# EAGLE board rakboard2_pre_ar2_f1 (EAGLE 7.7.0), part 1 of 3
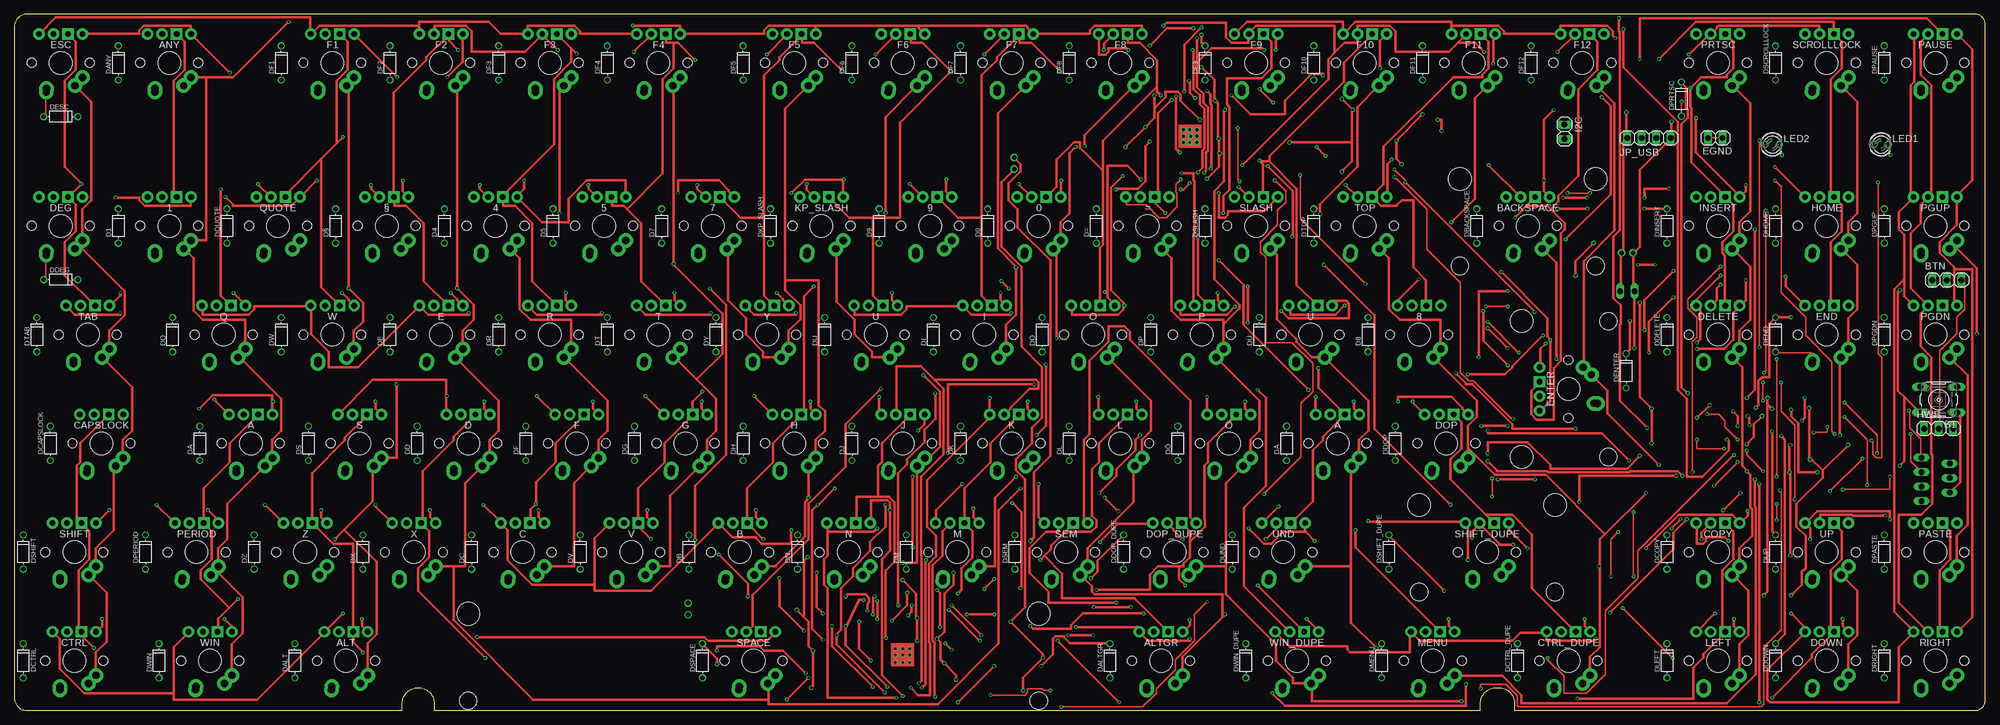
[diagram p0: board, top side]
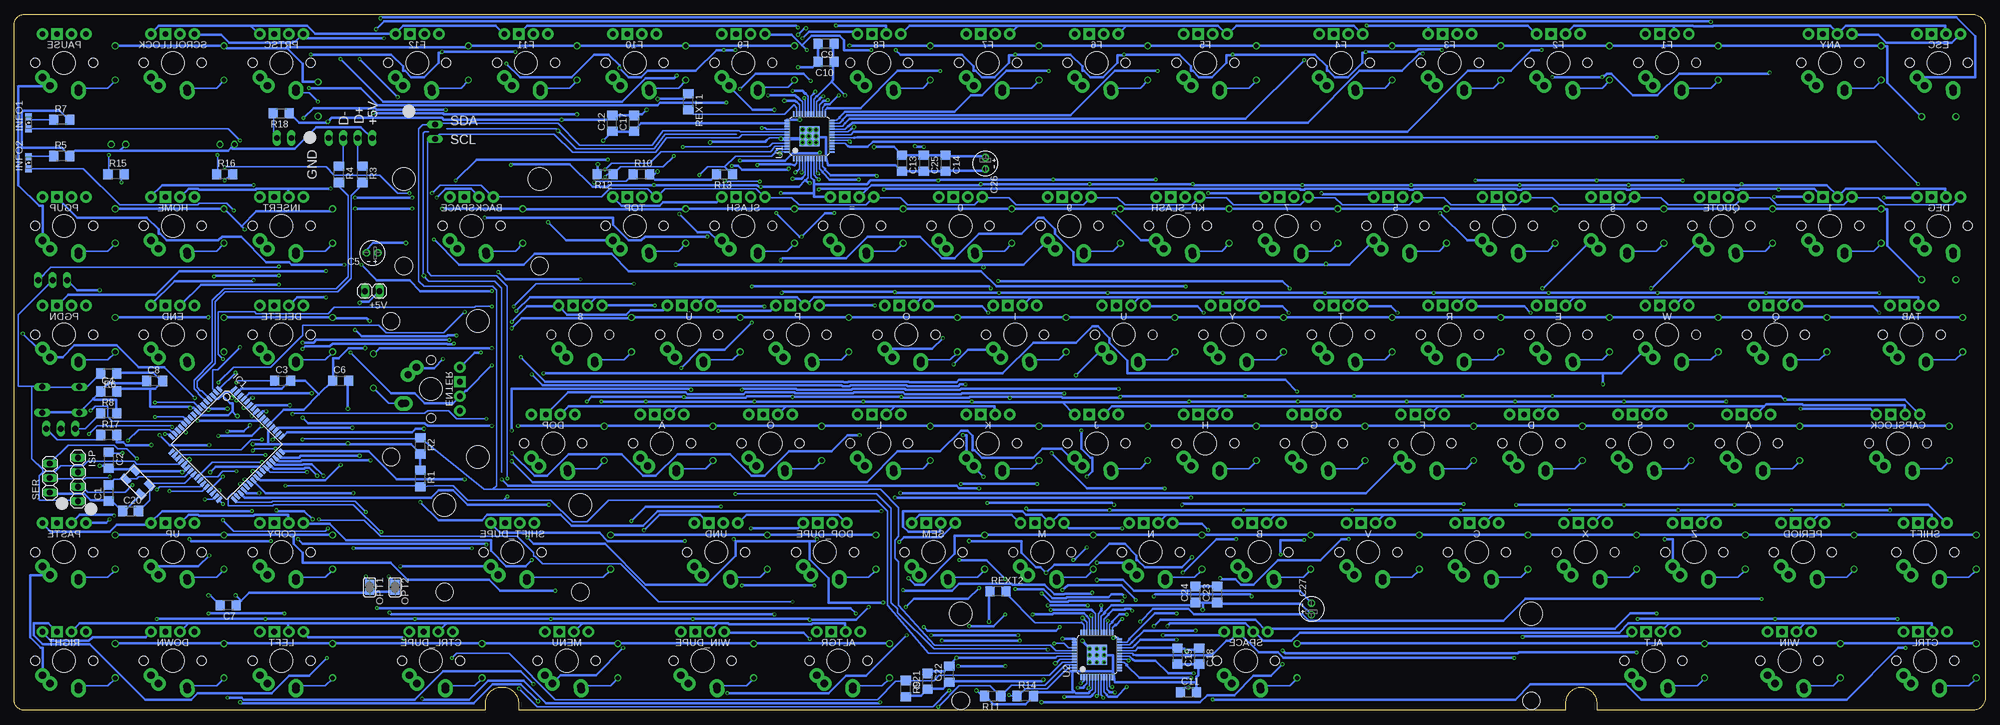
[diagram p1: board, bottom side, seen from below]

Size 345.5 x 122 mm. Coordinates in mm from the lower left corner, seen from the top.
Outline: 0,119.76 0,2.24 arc90 2.24,0 68,0 68,1.17 arc-90 70.83,4 arc-90 73.6,1.23 73.6,0 257,0 257,1.17 arc-90 259.83,4 260.17,4 arc-90 263,1.17 263,0 343.7,0 arc90 345.5,1.8 345.5,120.2 arc90 343.7,122 2.24,122 arc90 0,119.76
Copper layers (1*16): Top 0.035mm / dielectric 1.6mm / Bottom 0.035mm
Design rules "EasyEDAstd": minimum track width 6mil, minimum drill 0.3mm, track to track 6mil, track to pad 6mil, pad to pad 6mil, via to via 6mil, smd to smd 6mil, copper to edge 0.3mm, drill to drill 0.2mm, minimum pad ring 0.2mm, minimum via ring 0.15mm, stop-mask expansion 0.075mm, vias tented up to drill 0mil, thermal gap 0.2mm
Net classes: 0 default: width 0.305 mm, drill 0.254 mm, clearance 0.203 mm; 1 power: width 0.457 mm, drill 0.406 mm, clearance 0.203 mm; 2 gnd: width 0.457 mm, drill 0.406 mm, clearance 0.203 mm; 3 leddriver: width 0.406 mm, drill 0.305 mm, clearance 0.203 mm; 4 keyboard: width 0.406 mm, drill 0.356 mm, clearance 0.203 mm; 5 i2c: width 0.305 mm, drill 0.254 mm, clearance 0.203 mm

## Footprints (pad centres in the part's own frame; a part is rotated, then mirrored left to right if it is on the bottom)
ALPSMX-1U-RGB = drill 1.3 pad 2.54: ALPS1 -2.5,4; ALPS2 2.5,4.5; MX1 -3.81,2.54; MX2 2.54,5.08 | drill 1 pad 2: B- 3.81,-5.08; G- 1.27,-5.08; R- -3.81,-5.08 | drill 1 pad 2 square: LED+ -1.27,-5.08 | hole 4: 0,0 | hole 1.6: -5.08,0; 5.08,0
1X02 = drill 1.016 long: 1 -1.27,0; 2 1.27,0
ALPSMX-2U-RGB = drill 1.3 pad 2.54: ALPS1 -2.5,4; ALPS2 2.5,4.5; MX1 -3.81,2.54; MX2 2.54,5.08 | drill 1 pad 2: B- 3.81,-5.08; G- 1.27,-5.08; R- -3.81,-5.08 | drill 1 pad 2 square: LED+ -1.27,-5.08 | hole 4: 0,0; -11.9,-8.24; 11.9,-8.24 | hole 1.6: -5.08,0; 5.08,0 | hole 3.05: -11.9,7; 11.9,7
1X03 = drill 1.016 long: 1 -2.54,0; 2 0,0; 3 2.54,0
C1206 = smd 1.6 x 1.8: 1 -1.4,0; 2 1.4,0
E2-4 = drill 0.813 pad 1.27: + -1.016,0 | drill 0.813 pad 1.27 octagon: - 1.016,0
DO-35 = drill 0.8: A -3,0; C 3,0
TQFP64 = smd 1.194 x 0.559: 1 -7.76,5.905; 2 -7.76,5.118; 3 -7.76,4.331; 4 -7.76,3.543; 5 -7.76,2.756; 6 -7.76,1.968; 7 -7.76,1.181; 8 -7.76,0.394; 9 -7.76,-0.394; 10 -7.76,-1.181; 11 -7.76,-1.968; 12 -7.76,-2.756; 13 -7.76,-3.543; 14 -7.76,-4.331; 15 -7.76,-5.118; 16 -7.76,-5.905; 33 7.76,-5.905; 34 7.76,-5.118; 35 7.76,-4.331; 36 7.76,-3.543; 37 7.76,-2.756; 38 7.76,-1.968; 39 7.76,-1.181; 40 7.76,-0.394; 41 7.76,0.394; 42 7.76,1.181; 43 7.76,1.968; 44 7.76,2.756; 45 7.76,3.543; 46 7.76,4.331; 47 7.76,5.118; 48 7.76,5.905 | smd 0.559 x 1.194: 17 -5.905,-7.76; 18 -5.118,-7.76; 19 -4.331,-7.76; 20 -3.543,-7.76; 21 -2.756,-7.76; 22 -1.968,-7.76; 23 -1.181,-7.76; 24 -0.394,-7.76; 25 0.394,-7.76; 26 1.181,-7.76; 27 1.968,-7.76; 28 2.756,-7.76; 29 3.543,-7.76; 30 4.331,-7.76; 31 5.118,-7.76; 32 5.905,-7.76; 49 5.905,7.76; 50 5.118,7.76; 51 4.331,7.76; 52 3.543,7.76; 53 2.756,7.76; 54 1.968,7.76; 55 1.181,7.76; 56 0.394,7.76; 57 -0.394,7.76; 58 -1.181,7.76; 59 -1.968,7.76; 60 -2.756,7.76; 61 -3.543,7.76; 62 -4.331,7.76; 63 -5.118,7.76; 64 -5.905,7.76
SML0805 = smd 1.2 x 1.2: A 1.05,0; C -1.05,0
1X04 = drill 1.016 long: 1 -3.81,0; 2 -1.27,0; 3 1.27,0; 4 3.81,0
LED3MM = drill 0.813 octagon: A -1.27,0; K 1.27,0
SJ = smd 1.168 x 1.6: 1 -0.762,0; 2 0.762,0
MJ = smd 1.8 x 1.2: P1 -1.85,-1.15; P2 1.85,-1.15; P3 1.85,1.15; P4 -1.85,1.15
R1206 = smd 1.6 x 1.803: 1 -1.422,0; 2 1.422,0
B3F-10XX = drill 1.016 long: 1 -3.251,2.261; 2 3.251,2.261; 3 -3.251,-2.261; 4 3.251,-2.261
ALPSMX-6.25U-RGB = drill 1.3 pad 2.54: ALPS1 -2.5,4; ALPS2 2.5,4.5; MX1 -3.81,2.54; MX2 2.54,5.08 | drill 1 pad 2: B- 3.81,-5.08; G- 1.27,-5.08; R- -3.81,-5.08 | drill 1 pad 2 square: LED+ -1.27,-5.08 | hole 4: 0,0; -50,-8.24; 50,-8.24 | hole 1.6: -5.08,0; 5.08,0 | hole 3.05: -50,7; 50,7
LQFP48_7X7 = smd 0.9 x 0.3: 1 -3.95,2.75; 2 -3.95,2.25; 3 -3.95,1.75; 4 -3.95,1.25; 5 -3.95,0.75; 6 -3.95,0.25; 7 -3.95,-0.25; 8 -3.95,-0.75; 9 -3.95,-1.25; 10 -3.95,-1.75; 11 -3.95,-2.25; 12 -3.95,-2.75; 25 3.95,-2.75; 26 3.95,-2.25; 27 3.95,-1.75; 28 3.95,-1.25; 29 3.95,-0.75; 30 3.95,-0.25; 31 3.95,0.25; 32 3.95,0.75; 33 3.95,1.25; 34 3.95,1.75; 35 3.95,2.25; 36 3.95,2.75 | smd 0.3 x 0.9: 13 -2.75,-3.95; 14 -2.25,-3.95; 15 -1.75,-3.95; 16 -1.25,-3.95; 17 -0.75,-3.95; 18 -0.25,-3.95; 19 0.25,-3.95; 20 0.75,-3.95; 21 1.25,-3.95; 22 1.75,-3.95; 23 2.25,-3.95; 24 2.75,-3.95; 37 2.75,3.95; 38 2.25,3.95; 39 1.75,3.95; 40 1.25,3.95; 41 0.75,3.95; 42 0.25,3.95; 43 -0.25,3.95; 44 -0.75,3.95; 45 -1.25,3.95; 46 -1.75,3.95; 47 -2.25,3.95; 48 -2.75,3.95 | smd 3.5 x 3.5: TP 0,0

## Placement (x,y rotation side)
0  KEYSWITCH-RGBLED-ALPSMX-1U-RGB  [ALPSMX-1U-RGB]  179.59,84.9 180 top
1  KEYSWITCH-RGBLED-ALPSMX-1U-RGB  [ALPSMX-1U-RGB]  27.2,84.9 180 top
4  KEYSWITCH-RGBLED-ALPSMX-1U-RGB  [ALPSMX-1U-RGB]  84.34,84.9 180 top
5  KEYSWITCH-RGBLED-ALPSMX-1U-RGB  [ALPSMX-1U-RGB]  103.39,84.9 180 top
7  KEYSWITCH-RGBLED-ALPSMX-1U-RGB  [ALPSMX-1U-RGB]  122.44,84.9 180 top
8  KEYSWITCH-RGBLED-ALPSMX-1U-RGB  [ALPSMX-1U-RGB]  246.26,65.85 180 top
9  KEYSWITCH-RGBLED-ALPSMX-1U-RGB  [ALPSMX-1U-RGB]  160.54,84.9 180 top
+5V  PWR  [1X02]  282.75,73.47 180 bottom
=  KEYSWITCH-RGBLED-ALPSMX-1U-RGB  [ALPSMX-1U-RGB]  198.65,84.9 180 top
A  KEYSWITCH-RGBLED-ALPSMX-1U-RGB  [ALPSMX-1U-RGB]  41.48,46.8 180 top
ALT  KEYSWITCH-RGBLED-ALPSMX-1U-RGB  [ALPSMX-1U-RGB]  58.15,8.7 180 top
ALTGR  KEYSWITCH-RGBLED-ALPSMX-1U-RGB  [ALPSMX-1U-RGB]  201.03,8.7 180 top
ANY  KEYSWITCH-RGBLED-ALPSMX-1U-RGB  [ALPSMX-1U-RGB]  27.2,113.47 180 top
B  KEYSWITCH-RGBLED-ALPSMX-1U-RGB  [ALPSMX-1U-RGB]  127.2,27.75 180 top
BACKSPACE  KEYSWITCH-RGBLED-ALPSMX-2U-RGB  [ALPSMX-2U-RGB]  265.31,84.9 180 top
BTN  JP1  [1X03]  338.77,75.41 0 top
C  KEYSWITCH-RGBLED-ALPSMX-1U-RGB  [ALPSMX-1U-RGB]  89.11,27.75 180 top
C1  22pF  [C1206]  328.93,38.1 90 bottom
C2  1uF  [C1206]  328.93,43.81 270 bottom
C3  100n  [C1206]  298.45,57.78 0 bottom
C4  100n  [C1206]  328.93,55.88 0 bottom
C5  10uF  [E2-4]  282.75,80.19 180 bottom
C6  100n  [C1206]  288.29,57.78 0 bottom
C7  100n  [C1206]  307.98,18.41 180 bottom
C8  100n  [C1206]  320.9,57.74 0 bottom
C9  0,47uF  [C1206]  203.2,116.84 180 bottom
C10  0,1uF  [C1206]  203.2,113.67 180 bottom
C11  470nF  [C1206]  139.7,3.17 0 bottom
C12  0,47uF  [C1206]  240.66,102.87 90 bottom
C13  0,1uF  [C1206]  189.87,95.89 270 bottom
C14  470nF  [C1206]  182.25,95.89 270 bottom
C17  100nF  [C1206]  236.85,102.87 90 bottom
C18  0,47uF  [C1206]  137.79,9.53 270 bottom
C19  0,1uF  [C1206]  141.6,9.53 270 bottom
C20  22pF  [C1206]  325.12,34.92 0 bottom
C21  0,47uF  [C1206]  185.42,5.08 90 bottom
C22  0,1uF  [C1206]  181.61,6.35 90 bottom
C23  0,47uF  [C1206]  134.62,20.32 90 bottom
C24  0,1uF  [C1206]  138.43,20.32 90 bottom
C25  0,47uF  [C1206]  186.06,95.89 270 bottom
C26  22uF  [E2-4]  175.26,95.89 270 bottom
C27  22uF  [E2-4]  118.11,17.78 90 bottom
CAPSLOCK  KEYSWITCH-RGBLED-ALPSMX-1U-RGB  [ALPSMX-1U-RGB]  15.29,46.8 180 top
COPY  KEYSWITCH-RGBLED-ALPSMX-1U-RGB  [ALPSMX-1U-RGB]  298.65,27.75 180 top
CTRL  KEYSWITCH-RGBLED-ALPSMX-1U-RGB  [ALPSMX-1U-RGB]  10.53,8.7 180 top
CTRL_DUPE  KEYSWITCH-RGBLED-ALPSMX-1U-RGB  [ALPSMX-1U-RGB]  272.45,8.7 180 top
D  KEYSWITCH-RGBLED-ALPSMX-1U-RGB  [ALPSMX-1U-RGB]  79.58,46.8 180 top
D0  [DO-35]  170.65,84.9 90 top
D1  [DO-35]  18.25,84.9 90 top
D4  [DO-35]  75.39,84.9 90 top
D5  [DO-35]  94.44,84.9 90 top
D7  [DO-35]  113.5,84.9 90 top
D8  [DO-35]  237.31,65.85 90 top
D9  [DO-35]  151.59,84.9 90 top
D=  [DO-35]  189.69,84.9 90 top
DA  [DO-35]  32.52,46.8 90 top
DALT  [DO-35]  49.2,8.7 90 top
DALTGR  [DO-35]  192.07,8.7 90 top
DANY  [DO-35]  18.25,113.47 90 top
DB  [DO-35]  118.25,27.75 90 top
DBACKSPACE  [DO-35]  256.37,84.9 90 top
DC  [DO-35]  80.16,27.75 90 top
DCAPSLOCK  [DO-35]  6.33,46.8 90 top
DCOPY  [DO-35]  289.7,27.75 90 top
DCTRL  [DO-35]  1.57,8.7 90 top
DCTRL_DUPE  [DO-35]  263.5,8.7 90 top
DD  [DO-35]  70.62,46.8 90 top
DDEG  [DO-35]  8.14,75.48 0 top
DDELETE  [DO-35]  289.7,65.85 90 top
DDOP  [DO-35]  242.07,46.8 90 top
DDOP_DUPE  [DO-35]  194.46,27.75 90 top
DDOWN  [DO-35]  308.75,8.7 90 top
DE  [DO-35]  65.86,65.85 90 top
DEG  KEYSWITCH-RGBLED-ALPSMX-1U-RGB  [ALPSMX-1U-RGB]  8.14,84.9 180 top
DELETE  KEYSWITCH-RGBLED-ALPSMX-1U-RGB  [ALPSMX-1U-RGB]  298.65,65.85 180 top
DEND  [DO-35]  308.75,65.85 90 top
DENTER  [DO-35]  282.56,59.5 90 top
DESC  [DO-35]  8.14,104.06 0 top
DF  [DO-35]  89.67,46.8 90 top
DF1  [DO-35]  46.81,113.47 90 top
DF2  [DO-35]  65.86,113.47 90 top
DF3  [DO-35]  84.92,113.47 90 top
DF4  [DO-35]  103.97,113.47 90 top
DF5  [DO-35]  127.78,113.47 90 top
DF6  [DO-35]  146.82,113.47 90 top
DF7  [DO-35]  165.88,113.47 90 top
DF8  [DO-35]  184.93,113.47 90 top
DF9  [DO-35]  208.75,113.47 90 top
DF10  [DO-35]  227.79,113.47 90 top
DF11  [DO-35]  246.84,113.47 90 top
DF12  [DO-35]  265.89,113.47 90 top
DG  [DO-35]  108.72,46.8 90 top
DH  [DO-35]  127.78,46.8 90 top
DHOME  [DO-35]  308.75,84.9 90 top
DI  [DO-35]  161.12,65.85 90 top
DINSERT  [DO-35]  289.7,84.9 90 top
DJ  [DO-35]  146.82,46.8 90 top
DK  [DO-35]  165.88,46.8 90 top
DKP_SLASH  [DO-35]  132.54,84.9 90 top
DL  [DO-35]  184.93,46.8 90 top
DLEFT  [DO-35]  289.7,8.7 90 top
DM  [DO-35]  156.35,27.75 90 top
DMENU  [DO-35]  239.69,8.7 90 top
DN  [DO-35]  137.31,27.75 90 top
DO  [DO-35]  180.16,65.85 90 top
DOP  KEYSWITCH-RGBLED-ALPSMX-1U-RGB  [ALPSMX-1U-RGB]  251.03,46.8 180 top
DOP_DUPE  KEYSWITCH-RGBLED-ALPSMX-1U-RGB  [ALPSMX-1U-RGB]  203.41,27.75 180 top
DOWN  KEYSWITCH-RGBLED-ALPSMX-1U-RGB  [ALPSMX-1U-RGB]  317.7,8.7 180 top
DP  [DO-35]  199.22,65.85 90 top
DPASTE  [DO-35]  327.81,27.75 90 top
DPAUSE  [DO-35]  327.81,113.47 90 top
DPERIOD  [DO-35]  23,27.75 90 top
DPGDN  [DO-35]  327.81,65.85 90 top
DPGUP  [DO-35]  327.81,84.9 90 top
DPRTSC  [DO-35]  292.25,107.12 90 top
DQ  [DO-35]  27.77,65.85 90 top
DQUOTE  [DO-35]  37.3,84.9 90 top
DR  [DO-35]  84.92,65.85 90 top
DRIGHT  [DO-35]  327.81,8.7 90 top
DS  [DO-35]  51.58,46.8 90 top
DSCROLLLOCK  [DO-35]  308.75,113.47 90 top
DSEM  [DO-35]  175.41,27.75 90 top
DSHIFT  [DO-35]  1.57,27.75 90 top
DSHIFT_DUPE  [DO-35]  240.97,27.75 90 top
DSLASH  [DO-35]  208.75,84.9 90 top
DSPACE  [DO-35]  120.64,8.7 90 top
DT  [DO-35]  103.97,65.85 90 top
DTAB  [DO-35]  3.96,65.85 90 top
DTOP  [DO-35]  227.79,84.9 90 top
DU  [DO-35]  142.06,65.85 90 top
DUND  [DO-35]  213.5,27.75 90 top
DUP  [DO-35]  308.75,27.75 90 top
DV  [DO-35]  99.2,27.75 90 top
DW  [DO-35]  46.81,65.85 90 top
DWIN  [DO-35]  25.39,8.7 90 top
DWIN_DUPE  [DO-35]  215.88,8.7 90 top
DX  [DO-35]  61.1,27.75 90 top
DY  [DO-35]  123.02,65.85 90 top
DZ  [DO-35]  42.05,27.75 90 top
D§  [DO-35]  56.34,84.9 90 top
DÄ  [DO-35]  223.03,46.8 90 top
DÖ  [DO-35]  203.97,46.8 90 top
DÜ  [DO-35]  218.26,65.85 90 top
E  KEYSWITCH-RGBLED-ALPSMX-1U-RGB  [ALPSMX-1U-RGB]  74.81,65.85 180 top
EGND  ESD  [1X02]  298.2,100.33 0 top
END  KEYSWITCH-RGBLED-ALPSMX-1U-RGB  [ALPSMX-1U-RGB]  317.7,65.85 180 top
ENTER  KEYSWITCH-RGBLED-ALPSMX-2U-RGB  [ALPSMX-2U-RGB]  272.45,56.33 270 top
ESC  KEYSWITCH-RGBLED-ALPSMX-1U-RGB  [ALPSMX-1U-RGB]  8.14,113.47 180 top
F  KEYSWITCH-RGBLED-ALPSMX-1U-RGB  [ALPSMX-1U-RGB]  98.62,46.8 180 top
F1  KEYSWITCH-RGBLED-ALPSMX-1U-RGB  [ALPSMX-1U-RGB]  55.77,113.47 180 top
F2  KEYSWITCH-RGBLED-ALPSMX-1U-RGB  [ALPSMX-1U-RGB]  74.81,113.47 180 top
F3  KEYSWITCH-RGBLED-ALPSMX-1U-RGB  [ALPSMX-1U-RGB]  93.86,113.47 180 top
F4  KEYSWITCH-RGBLED-ALPSMX-1U-RGB  [ALPSMX-1U-RGB]  112.92,113.47 180 top
F5  KEYSWITCH-RGBLED-ALPSMX-1U-RGB  [ALPSMX-1U-RGB]  136.72,113.47 180 top
F6  KEYSWITCH-RGBLED-ALPSMX-1U-RGB  [ALPSMX-1U-RGB]  155.78,113.47 180 top
F7  KEYSWITCH-RGBLED-ALPSMX-1U-RGB  [ALPSMX-1U-RGB]  174.82,113.47 180 top
F8  KEYSWITCH-RGBLED-ALPSMX-1U-RGB  [ALPSMX-1U-RGB]  193.88,113.47 180 top
F9  KEYSWITCH-RGBLED-ALPSMX-1U-RGB  [ALPSMX-1U-RGB]  217.69,113.47 180 top
F10  KEYSWITCH-RGBLED-ALPSMX-1U-RGB  [ALPSMX-1U-RGB]  236.75,113.47 180 top
F11  KEYSWITCH-RGBLED-ALPSMX-1U-RGB  [ALPSMX-1U-RGB]  255.79,113.47 180 top
F12  KEYSWITCH-RGBLED-ALPSMX-1U-RGB  [ALPSMX-1U-RGB]  274.85,113.47 180 top
G  KEYSWITCH-RGBLED-ALPSMX-1U-RGB  [ALPSMX-1U-RGB]  117.67,46.8 180 top
H  KEYSWITCH-RGBLED-ALPSMX-1U-RGB  [ALPSMX-1U-RGB]  136.72,46.8 180 top
HOME  KEYSWITCH-RGBLED-ALPSMX-1U-RGB  [ALPSMX-1U-RGB]  317.7,84.9 180 top
HWB  JP2  [1X03]  337.34,49.37 0 top
I  KEYSWITCH-RGBLED-ALPSMX-1U-RGB  [ALPSMX-1U-RGB]  170.06,65.85 180 top
I2C  JP5  [1X02]  271.75,101.4 270 top
IC1  AT90USB1286  [TQFP64]  308.26,46.63 315 bottom
INFO1  [SML0805]  343,103 90 bottom
INFO2  [SML0805]  343,96 90 bottom
INSERT  KEYSWITCH-RGBLED-ALPSMX-1U-RGB  [ALPSMX-1U-RGB]  298.65,84.9 180 top
ISP  JP4  [1X04]  334.31,40.48 270 bottom
J  KEYSWITCH-RGBLED-ALPSMX-1U-RGB  [ALPSMX-1U-RGB]  155.78,46.8 180 top
JP_USB  JP_USB  [1X04]  286.56,100.33 0 top
K  KEYSWITCH-RGBLED-ALPSMX-1U-RGB  [ALPSMX-1U-RGB]  174.82,46.8 180 top
KP_SLASH  KEYSWITCH-RGBLED-ALPSMX-1U-RGB  [ALPSMX-1U-RGB]  141.5,84.9 180 top
L  KEYSWITCH-RGBLED-ALPSMX-1U-RGB  [ALPSMX-1U-RGB]  193.88,46.8 180 top
LED1  [LED3MM]  327.24,99.19 0 top
LED2  [LED3MM]  308.18,99.19 0 top
LEFT  KEYSWITCH-RGBLED-ALPSMX-1U-RGB  [ALPSMX-1U-RGB]  298.65,8.7 180 top
M  KEYSWITCH-RGBLED-ALPSMX-1U-RGB  [ALPSMX-1U-RGB]  165.31,27.75 180 top
MENU  KEYSWITCH-RGBLED-ALPSMX-1U-RGB  [ALPSMX-1U-RGB]  248.65,8.7 180 top
N  KEYSWITCH-RGBLED-ALPSMX-1U-RGB  [ALPSMX-1U-RGB]  146.25,27.75 180 top
O  KEYSWITCH-RGBLED-ALPSMX-1U-RGB  [ALPSMX-1U-RGB]  189.12,65.85 180 top
OPT1  OPT1  [SJ]  283.21,21.59 270 bottom
OPT2  OPT2  [SJ]  278.76,21.59 270 bottom
P  KEYSWITCH-RGBLED-ALPSMX-1U-RGB  [ALPSMX-1U-RGB]  208.16,65.85 180 top
PASTE  KEYSWITCH-RGBLED-ALPSMX-1U-RGB  [ALPSMX-1U-RGB]  336.75,27.75 180 top
PAUSE  KEYSWITCH-RGBLED-ALPSMX-1U-RGB  [ALPSMX-1U-RGB]  336.75,113.47 180 top
PERIOD  KEYSWITCH-RGBLED-ALPSMX-1U-RGB  [ALPSMX-1U-RGB]  31.95,27.75 180 top
PGDN  KEYSWITCH-RGBLED-ALPSMX-1U-RGB  [ALPSMX-1U-RGB]  336.75,65.85 180 top
PGUP  KEYSWITCH-RGBLED-ALPSMX-1U-RGB  [ALPSMX-1U-RGB]  336.75,84.9 180 top
PRTSC  KEYSWITCH-RGBLED-ALPSMX-1U-RGB  [ALPSMX-1U-RGB]  298.65,113.47 180 top
Q  KEYSWITCH-RGBLED-ALPSMX-1U-RGB  [ALPSMX-1U-RGB]  36.72,65.85 180 top
Q4  16MHz  [MJ]  323.85,40.01 135 bottom
QUOTE  KEYSWITCH-RGBLED-ALPSMX-1U-RGB  [ALPSMX-1U-RGB]  46.24,84.9 180 top
R  KEYSWITCH-RGBLED-ALPSMX-1U-RGB  [ALPSMX-1U-RGB]  93.86,65.85 180 top
R1  4K7  [R1206]  274.32,40.64 270 bottom
R2  4K7  [R1206]  274.32,46.35 270 bottom
R3  22  [R1206]  284.48,93.93 270 bottom
R4  22  [R1206]  288.61,93.93 270 bottom
R5  270  [R1206]  337.19,97.16 0 bottom
R6  10k  [R1206]  328.93,59.05 180 bottom
R7  270  [R1206]  337.19,103.5 0 bottom
R8  100k  [R1206]  328.93,52.07 0 bottom
R9  100k  [R1206]  189.23,3.81 270 bottom
R10  100k  [R1206]  235.59,93.98 0 bottom
R11  100k  [R1206]  173.99,2.54 180 bottom
R12  100k  [R1206]  241.94,93.98 180 bottom
R13  100k  [R1206]  220.98,93.98 180 bottom
R14  100k  [R1206]  168.28,2.54 0 bottom
R15  270  [R1206]  327.66,93.98 0 bottom
R16  270  [R1206]  308.61,93.98 0 bottom
R17  100k  [R1206]  328.93,48.26 0 bottom
R18  1M0  [R1206]  298.72,104.66 180 bottom
REXT1  20k  [R1206]  227.33,106.68 270 bottom
REXT2  20k  [R1206]  173.05,20.86 0 bottom
RIGHT  KEYSWITCH-RGBLED-ALPSMX-1U-RGB  [ALPSMX-1U-RGB]  336.75,8.7 180 top
S  KEYSWITCH-RGBLED-ALPSMX-1U-RGB  [ALPSMX-1U-RGB]  60.52,46.8 180 top
S1  [B3F-10XX]  337.34,54.45 180 top
SCROLLLOCK  KEYSWITCH-RGBLED-ALPSMX-1U-RGB  [ALPSMX-1U-RGB]  317.7,113.47 180 top
SEM  KEYSWITCH-RGBLED-ALPSMX-1U-RGB  [ALPSMX-1U-RGB]  184.35,27.75 180 top
SER  JP3  [1X03]  339.26,40.72 90 bottom
SHIFT  KEYSWITCH-RGBLED-ALPSMX-1U-RGB  [ALPSMX-1U-RGB]  10.53,27.75 180 top
SHIFT_DUPE  KEYSWITCH-RGBLED-ALPSMX-2U-RGB  [ALPSMX-2U-RGB]  258.18,27.75 180 top
SLASH  KEYSWITCH-RGBLED-ALPSMX-1U-RGB  [ALPSMX-1U-RGB]  217.69,84.9 180 top
SPACE  KEYSWITCH-RGBLED-ALPSMX-6.25U-RGB  [ALPSMX-6.25U-RGB]  129.59,8.7 180 top
T  KEYSWITCH-RGBLED-ALPSMX-1U-RGB  [ALPSMX-1U-RGB]  112.92,65.85 180 top
TAB  KEYSWITCH-RGBLED-ALPSMX-1U-RGB  [ALPSMX-1U-RGB]  12.9,65.85 180 top
TOP  KEYSWITCH-RGBLED-ALPSMX-1U-RGB  [ALPSMX-1U-RGB]  236.75,84.9 180 top
U  KEYSWITCH-RGBLED-ALPSMX-1U-RGB  [ALPSMX-1U-RGB]  151.01,65.85 180 top
U1  [LQFP48_7X7]  206.09,100.64 90 bottom
U2  [LQFP48_7X7]  155.73,9.73 90 bottom
UND  KEYSWITCH-RGBLED-ALPSMX-1U-RGB  [ALPSMX-1U-RGB]  222.46,27.75 180 top
UP  KEYSWITCH-RGBLED-ALPSMX-1U-RGB  [ALPSMX-1U-RGB]  317.7,27.75 180 top
V  KEYSWITCH-RGBLED-ALPSMX-1U-RGB  [ALPSMX-1U-RGB]  108.16,27.75 180 top
W  KEYSWITCH-RGBLED-ALPSMX-1U-RGB  [ALPSMX-1U-RGB]  55.77,65.85 180 top
WIN  KEYSWITCH-RGBLED-ALPSMX-1U-RGB  [ALPSMX-1U-RGB]  34.34,8.7 180 top
WIN_DUPE  KEYSWITCH-RGBLED-ALPSMX-1U-RGB  [ALPSMX-1U-RGB]  224.84,8.7 180 top
X  KEYSWITCH-RGBLED-ALPSMX-1U-RGB  [ALPSMX-1U-RGB]  70.06,27.75 180 top
Y  KEYSWITCH-RGBLED-ALPSMX-1U-RGB  [ALPSMX-1U-RGB]  131.97,65.85 180 top
Z  KEYSWITCH-RGBLED-ALPSMX-1U-RGB  [ALPSMX-1U-RGB]  51.01,27.75 180 top
§  KEYSWITCH-RGBLED-ALPSMX-1U-RGB  [ALPSMX-1U-RGB]  65.3,84.9 180 top
Ä  KEYSWITCH-RGBLED-ALPSMX-1U-RGB  [ALPSMX-1U-RGB]  231.97,46.8 180 top
Ö  KEYSWITCH-RGBLED-ALPSMX-1U-RGB  [ALPSMX-1U-RGB]  212.93,46.8 180 top
Ü  KEYSWITCH-RGBLED-ALPSMX-1U-RGB  [ALPSMX-1U-RGB]  227.22,65.85 180 top

## Library data of the parts
0 1 4 5 7-9 = A ALT ALTGR ANY B BACKSPACE C CAPSLOCK COPY CTRL CTRL_DUPE D DEG DELETE DOP DOP_DUPE DOWN E END ENTER ESC F F1-F12 G H HOME I INSERT J K KP_SLASH L LEFT M MENU N O P PASTE PAUSE PERIOD PGDN PGUP PRTSC Q QUOTE R RIGHT S SCROLLLOCK SEM SHIFT SHIFT_DUPE SLASH SPACE T TAB TOP U UND UP V W WIN WIN_DUPE X Y Z § Ä Ö Ü = Keyboard
+5V BTN EGND HWB I2C ISP JP_USB SER = pinhead
C1-C14 C17-C27 R1-R18 REXT1 REXT2 = rcl
D0 D1 D4 D5 D7-D9 D= DA DALT DALTGR DANY DB DBACKSPACE DC DCAPSLOCK DCOPY DCTRL DCTRL_DUPE DD DDEG DDELETE DDOP DDOP_DUPE DDOWN DE DEND DENTER DESC DF DF1-DF12 DG DH DHOME DI DINSERT DJ DK DKP_SLASH DL DLEFT DM DMENU DN DO DP DPASTE DPAUSE DPERIOD DPGDN DPGUP DPRTSC DQ DQUOTE DR DRIGHT DS DSCROLLLOCK DSEM DSHIFT DSHIFT_DUPE DSLASH DSPACE DT DTAB DTOP DU DUND DUP DV DW DWIN DWIN_DUPE DX DY DZ D§ DÄ DÖ DÜ = Seeed-OPL-Diode
IC1 = controller-micro_atmel_jd
INFO1 INFO2 LED1 LED2 = led
OPT1 OPT2 = jumper
Q4 = Crystals-new
S1 = switch-omron; MPN: B3F-1000; OC_FARNELL: 176432; OC_NEWARK: 36M3542
U1 U2 = kiibohd

## Nets
1CS1 [leddriver]: DEG.LED+ ESC.LED+ TAB.LED+ U1.16
1CS2 [leddriver]: 1.LED+ ANY.LED+ Q.LED+ U1.17
1CS3 [leddriver]: F1.LED+ QUOTE.LED+ U1.18 W.LED+
1CS4 [leddriver]: E.LED+ F2.LED+ U1.19 §.LED+
1CS5 [leddriver]: 4.LED+ F3.LED+ R.LED+ U1.21
1CS6 [leddriver]: 5.LED+ F4.LED+ T.LED+ U1.22
1CS7 [leddriver]: 7.LED+ F5.LED+ U1.23 Y.LED+
1CS8 [leddriver]: F6.LED+ KP_SLASH.LED+ U1.24 U.LED+
1CS9 [leddriver]: 9.LED+ F7.LED+ I.LED+ U1.25
1CS10 [leddriver]: 0.LED+ F8.LED+ O.LED+ U1.26
1CS11 [leddriver]: =.LED+ F9.LED+ P.LED+ U1.27
1CS12 [leddriver]: F10.LED+ SLASH.LED+ U1.28 Ü.LED+
1CS13 [leddriver]: 8.LED+ F11.LED+ TOP.LED+ U1.30
1CS14 [leddriver]: BACKSPACE.LED+ ENTER.LED+ F12.LED+ U1.31
1CS15 [leddriver]: DELETE.LED+ INSERT.LED+ PRTSC.LED+ U1.32
1CS16 [leddriver]: END.LED+ HOME.LED+ SCROLLLOCK.LED+ U1.33
1SW1_G [leddriver]: ANY.G- ESC.G- F1.G- F2.G- F3.G- F4.G- F5.G- F6.G- F7.G- F8.G- F9.G- F10.G- F11.G- F12.G- PRTSC.G- SCROLLLOCK.G- U1.2
1SW2_R [leddriver]: ANY.R- ESC.R- F1.R- F2.R- F3.R- F4.R- F5.R- F6.R- F7.R- F8.R- F9.R- F10.R- F11.R- F12.R- PRTSC.R- SCROLLLOCK.R- U1.3
1SW3_B [leddriver]: ANY.B- ESC.B- F1.B- F2.B- F3.B- F4.B- F5.B- F6.B- F7.B- F8.B- F9.B- F10.B- F11.B- F12.B- PRTSC.B- SCROLLLOCK.B- U1.4
1SW4_G [leddriver]: 0.G- 1.G- 4.G- 5.G- 7.G- 9.G- =.G- BACKSPACE.G- DEG.G- HOME.G- INSERT.G- KP_SLASH.G- QUOTE.G- SLASH.G- TOP.G- U1.6 §.G-
1SW5_R [leddriver]: 0.R- 1.R- 4.R- 5.R- 7.R- 9.R- =.R- BACKSPACE.R- DEG.R- HOME.R- INSERT.R- KP_SLASH.R- QUOTE.R- SLASH.R- TOP.R- U1.7 §.R-
1SW6_B: 0.B- 1.B- 4.B- 5.B- 7.B- 9.B- =.B- BACKSPACE.B- DEG.B- HOME.B- KP_SLASH.B- QUOTE.B- SLASH.B- TOP.B- U1.8 §.B-
1SW7_G [leddriver]: 8.G- DELETE.G- E.G- END.G- ENTER.G- I.G- O.G- P.G- Q.G- R.G- T.G- TAB.G- U1.9 U.G- W.G- Y.G- Ü.G-
1SW8_R [leddriver]: 8.R- DELETE.R- E.R- END.R- ENTER.R- I.R- O.R- P.R- Q.R- R.R- T.R- TAB.R- U1.10 U.R- W.R- Y.R- Ü.R-
1SW9_B [leddriver]: 8.B- DELETE.B- E.B- END.B- ENTER.B- I.B- O.B- P.B- Q.B- R.B- T.B- TAB.B- U1.11 U.B- W.B- Y.B- Ü.B-
1SW10_G [leddriver]: U1.13
1SW11_R [leddriver]: U1.14
1SW12_B [leddriver]: U1.15
2CS1 [leddriver]: CAPSLOCK.LED+ CTRL.LED+ SHIFT.LED+ U2.16
2CS2 [leddriver]: A.LED+ PERIOD.LED+ U2.17 WIN.LED+
2CS3 [leddriver]: ALT.LED+ S.LED+ U2.18 Z.LED+
2CS4 [leddriver]: D.LED+ SPACE.LED+ U2.19 X.LED+
2CS5 [leddriver]: C.LED+ F.LED+ PGDN.LED+ U2.21
2CS6 [leddriver]: G.LED+ PGUP.LED+ U2.22 V.LED+
2CS7 [leddriver]: B.LED+ H.LED+ PAUSE.LED+ U2.23
2CS8 [leddriver]: J.LED+ N.LED+ U2.24
2CS9 [leddriver]: K.LED+ M.LED+ U2.25
2CS10 [leddriver]: ALTGR.LED+ L.LED+ SEM.LED+ U2.26
2CS11 [leddriver]: DOP_DUPE.LED+ U2.27 WIN_DUPE.LED+ Ö.LED+
2CS12 [leddriver]: MENU.LED+ U2.28 UND.LED+ Ä.LED+
2CS13 [leddriver]: CTRL_DUPE.LED+ DOP.LED+ SHIFT_DUPE.LED+ U2.30
2CS14 [leddriver]: COPY.LED+ LEFT.LED+ U2.31
2CS15 [leddriver]: DOWN.LED+ U2.32 UP.LED+
2CS16 [leddriver]: PASTE.LED+ RIGHT.LED+ U2.33
2SW1_G [leddriver]: A.G- CAPSLOCK.G- D.G- DOP.G- F.G- G.G- H.G- J.G- K.G- L.G- S.G- U2.2 Ä.G- Ö.G-
2SW2_R [leddriver]: A.R- CAPSLOCK.R- D.R- DOP.R- F.R- G.R- H.R- J.R- K.R- L.R- S.R- U2.3 Ä.R- Ö.R-
2SW3_B [leddriver]: A.B- CAPSLOCK.B- D.B- DOP.B- F.B- G.B- H.B- J.B- K.B- L.B- S.B- U2.4 Ä.B- Ö.B-
2SW4_G [leddriver]: B.G- C.G- COPY.G- DOP_DUPE.G- M.G- N.G- PASTE.G- PERIOD.G- SEM.G- SHIFT.G- SHIFT_DUPE.G- U2.6 UND.G- UP.G- V.G- X.G- Z.G-
2SW5_R [leddriver]: B.R- C.R- COPY.R- DOP_DUPE.R- M.R- N.R- PASTE.R- PERIOD.R- SEM.R- SHIFT.R- SHIFT_DUPE.R- U2.7 UND.R- UP.R- V.R- X.R- Z.R-
2SW6_B [leddriver]: B.B- C.B- COPY.B- DOP_DUPE.B- M.B- N.B- PASTE.B- PERIOD.B- SEM.B- SHIFT.B- SHIFT_DUPE.B- U2.8 UND.B- UP.B- V.B- X.B- Z.B-
2SW7_G [leddriver]: ALT.G- ALTGR.G- CTRL.G- CTRL_DUPE.G- DOWN.G- LEFT.G- MENU.G- PAUSE.G- PGDN.G- PGUP.G- RIGHT.G- SPACE.G- U2.9 WIN.G- WIN_DUPE.G-
2SW8_R [leddriver]: ALT.R- ALTGR.R- CTRL.R- CTRL_DUPE.R- DOWN.R- LEFT.R- MENU.R- PAUSE.R- PGDN.R- PGUP.R- RIGHT.R- SPACE.R- U2.10 WIN.R- WIN_DUPE.R-
2SW9_B [leddriver]: ALT.B- ALTGR.B- CTRL.B- CTRL_DUPE.B- DOWN.B- LEFT.B- MENU.B- PAUSE.B- PGDN.B- PGUP.B- RIGHT.B- SPACE.B- U2.11 WIN.B- WIN_DUPE.B-
2SW10_G [leddriver]: U2.13
2SW11_R [leddriver]: U2.14
2SW12_B [leddriver]: U2.15
+3V3: C2.1 IC1.7
C1 [keyboard]: CAPSLOCK.ALPS1 CAPSLOCK.MX1 CTRL.ALPS1 CTRL.MX1 DEG.ALPS1 DEG.MX1 ESC.ALPS1 ESC.MX1 IC1.51 SHIFT.ALPS1 SHIFT.MX1 TAB.ALPS1 TAB.MX1
C2 [keyboard]: 1.ALPS1 1.MX1 A.ALPS1 A.MX1 ANY.ALPS1 ANY.MX1 IC1.50 PERIOD.ALPS1 PERIOD.MX1 Q.ALPS1 Q.MX1 WIN.ALPS1 WIN.MX1
C3 [keyboard]: ALT.ALPS1 ALT.MX1 F1.ALPS1 F1.MX1 IC1.49 QUOTE.ALPS1 QUOTE.MX1 S.ALPS1 S.MX1 W.ALPS1 W.MX1 Z.ALPS1 Z.MX1
C4 [keyboard]: D.ALPS1 D.MX1 E.ALPS1 E.MX1 F2.ALPS1 F2.MX1 IC1.48 SPACE.ALPS1 SPACE.MX1 X.ALPS1 X.MX1 §.ALPS1 §.MX1
C5 [keyboard]: 4.ALPS1 4.MX1 C.ALPS1 C.MX1 F3.ALPS1 F3.MX1 F.ALPS1 F.MX1 IC1.47 R.ALPS1 R.MX1
C6 [keyboard]: 5.ALPS1 5.MX1 F4.ALPS1 F4.MX1 G.ALPS1 G.MX1 IC1.46 T.ALPS1 T.MX1 V.ALPS1 V.MX1
C7 [keyboard]: 7.ALPS1 7.MX1 B.ALPS1 B.MX1 F5.ALPS1 F5.MX1 H.ALPS1 H.MX1 IC1.45 Y.ALPS1 Y.MX1
C8 [keyboard]: F6.ALPS1 F6.MX1 IC1.44 J.ALPS1 J.MX1 KP_SLASH.ALPS1 KP_SLASH.MX1 N.ALPS1 N.MX1 U.ALPS1 U.MX1
C9 [keyboard]: 9.ALPS1 9.MX1 F7.ALPS1 F7.MX1 I.ALPS1 I.MX1 IC1.35 K.ALPS1 K.MX1 M.ALPS1 M.MX1
C10 [keyboard]: 0.ALPS1 0.MX1 ALTGR.ALPS1 ALTGR.MX1 F8.ALPS1 F8.MX1 IC1.36 L.ALPS1 L.MX1 O.ALPS1 O.MX1 SEM.ALPS1 SEM.MX1
C11 [keyboard]: =.ALPS1 =.MX1 DOP_DUPE.ALPS1 DOP_DUPE.MX1 F9.ALPS1 F9.MX1 IC1.37 P.ALPS1 P.MX1 WIN_DUPE.ALPS1 WIN_DUPE.MX1 Ö.ALPS1 Ö.MX1
C12 [keyboard]: F10.ALPS1 F10.MX1 IC1.38 MENU.ALPS1 MENU.MX1 SLASH.ALPS1 SLASH.MX1 UND.ALPS1 UND.MX1 Ä.ALPS1 Ä.MX1 Ü.ALPS1 Ü.MX1
C13 [keyboard]: 8.ALPS1 8.MX1 CTRL_DUPE.ALPS1 CTRL_DUPE.MX1 DOP.ALPS1 DOP.MX1 F11.ALPS1 F11.MX1 IC1.39 SHIFT_DUPE.ALPS1 SHIFT_DUPE.MX1 TOP.ALPS1 TOP.MX1
C14 [keyboard]: BACKSPACE.ALPS1 BACKSPACE.MX1 ENTER.ALPS1 ENTER.MX1 F12.ALPS1 F12.MX1 IC1.40
C15 [keyboard]: COPY.ALPS1 COPY.MX1 DELETE.ALPS1 DELETE.MX1 IC1.41 INSERT.ALPS1 INSERT.MX1 LEFT.ALPS1 LEFT.MX1 PRTSC.ALPS1 PRTSC.MX1
C16 [keyboard]: DOWN.ALPS1 DOWN.MX1 END.ALPS1 END.MX1 HOME.ALPS1 HOME.MX1 IC1.42 SCROLLLOCK.ALPS1 SCROLLLOCK.MX1 UP.ALPS1 UP.MX1
C17 [keyboard]: IC1.55 PASTE.ALPS1 PASTE.MX1 PAUSE.ALPS1 PAUSE.MX1 PGDN.ALPS1 PGDN.MX1 PGUP.ALPS1 PGUP.MX1 RIGHT.ALPS1 RIGHT.MX1
C18: IC1.54
GND [gnd]: +5V.2 BTN.1 C1.1 C2.2 C3.2 C4.1 C5.- C6.1 C7.1 C8.1 C9.2 C10.2 C11.2 C12.2 C13.2 C14.2 C17.2 C18.2 C19.2 C20.1 C21.2 C22.2 C23.2 C24.2 C25.2 C26.- C27.- IC1.6 IC1.22 IC1.53 IC1.63 JP_USB.4 OPT1.2 OPT2.2 Q4.P2 Q4.P4 R8.2 R10.2 R11.2 R13.2 R14.2 R18.1 REXT1.1 REXT2.1 S1.1 S1.2 SER.1 U1.5 U1.12 U1.34 U1.43 U1.44 U1.48 U1.TP U2.5 U2.12 U2.34 U2.43 U2.48 U2.TP
HWB: BTN.3 HWB.2 IC1.43
ILED1: IC1.1 INFO2.C
INFO1: IC1.2 INFO1.C
ISSI_SYNC: U1.40 U2.40
MISO/PDO: IC1.13 ISP.2
MOSI/PDI: IC1.12 ISP.1
N$1: DESC.A ESC.ALPS2 ESC.MX2
N$3: INFO1.A R7.1
N$6: REXT1.2 U1.35
N$8: REXT2.2 U2.35
N$9: HWB.1 R8.1
N$10: EGND.1 EGND.2 R18.2
N$11: ANY.ALPS2 ANY.MX2 DANY.A
N$12: DF1.A F1.ALPS2 F1.MX2
N$13: DF2.A F2.ALPS2 F2.MX2
N$14: DF3.A F3.ALPS2 F3.MX2
N$15: DF4.A F4.ALPS2 F4.MX2
N$16: DF5.A F5.ALPS2 F5.MX2
N$17: DF6.A F6.ALPS2 F6.MX2
N$18: DF7.A F7.ALPS2 F7.MX2
N$19: DF8.A F8.ALPS2 F8.MX2
N$20: DF9.A F9.ALPS2 F9.MX2
N$21: DF10.A F10.ALPS2 F10.MX2
N$22: DF11.A F11.ALPS2 F11.MX2
N$23: HWB.3 R17.1
N$24: C3.1 IC1.62
N$26: DF12.A F12.ALPS2 F12.MX2
N$27: DPRTSC.A PRTSC.ALPS2 PRTSC.MX2
N$28: DSCROLLLOCK.A SCROLLLOCK.ALPS2 SCROLLLOCK.MX2
N$29: DPAUSE.A PAUSE.ALPS2 PAUSE.MX2
N$30: DDEG.A DEG.ALPS2 DEG.MX2
N$31: 1.ALPS2 1.MX2 D1.A
N$32: DQUOTE.A QUOTE.ALPS2 QUOTE.MX2
N$33: D§.A §.ALPS2 §.MX2
N$34: 4.ALPS2 4.MX2 D4.A
N$35: 5.ALPS2 5.MX2 D5.A
N$36: 7.ALPS2 7.MX2 D7.A
N$37: IC1.33 OPT1.1
N$38: DKP_SLASH.A KP_SLASH.ALPS2 KP_SLASH.MX2
N$40: IC1.34 OPT2.1
N$41: 9.ALPS2 9.MX2 D9.A
N$42: 0.ALPS2 0.MX2 D0.A
N$43: =.ALPS2 =.MX2 D=.A
N$44: INFO2.A R5.1
N$46: DSLASH.A SLASH.ALPS2 SLASH.MX2
N$48: DTOP.A TOP.ALPS2 TOP.MX2
N$49: BACKSPACE.ALPS2 BACKSPACE.MX2 DBACKSPACE.A
N$50: DINSERT.A INSERT.ALPS2 INSERT.MX2
N$51: DHOME.A HOME.ALPS2 HOME.MX2
N$52: DPGUP.A PGUP.ALPS2 PGUP.MX2
N$53: DTAB.A TAB.ALPS2 TAB.MX2
N$54: DQ.A Q.ALPS2 Q.MX2
N$55: DW.A W.ALPS2 W.MX2
N$56: DE.A E.ALPS2 E.MX2
N$57: DR.A R.ALPS2 R.MX2
N$58: DT.A T.ALPS2 T.MX2
N$59: DY.A Y.ALPS2 Y.MX2
N$60: DU.A U.ALPS2 U.MX2
N$61: DI.A I.ALPS2 I.MX2
N$62: DO.A O.ALPS2 O.MX2
N$63: DP.A P.ALPS2 P.MX2
N$64: C1.2 IC1.23 Q4.P3
N$65: C20.2 IC1.24 Q4.P1
N$66: DÜ.A Ü.ALPS2 Ü.MX2
N$67: LED1.K R15.1
N$68: LED2.K R16.1
N$70: 8.ALPS2 8.MX2 D8.A
N$71: DENTER.A ENTER.ALPS2 ENTER.MX2
N$72: DDELETE.A DELETE.ALPS2 DELETE.MX2
N$73: DEND.A END.ALPS2 END.MX2
N$75: DPGDN.A PGDN.ALPS2 PGDN.MX2
N$76: CAPSLOCK.ALPS2 CAPSLOCK.MX2 DCAPSLOCK.A
N$77: A.ALPS2 A.MX2 DA.A
N$78: DS.A S.ALPS2 S.MX2
N$79: D.ALPS2 D.MX2 DD.A
N$80: DF.A F.ALPS2 F.MX2
N$81: DG.A G.ALPS2 G.MX2
N$82: DH.A H.ALPS2 H.MX2
N$83: DJ.A J.ALPS2 J.MX2
N$84: DK.A K.ALPS2 K.MX2
N$85: DL.A L.ALPS2 L.MX2
N$86: DÖ.A Ö.ALPS2 Ö.MX2
N$87: DÄ.A Ä.ALPS2 Ä.MX2
N$88: DDOP.A DOP.ALPS2 DOP.MX2
N$89: DSHIFT.A SHIFT.ALPS2 SHIFT.MX2
N$90: DPERIOD.A PERIOD.ALPS2 PERIOD.MX2
N$91: DZ.A Z.ALPS2 Z.MX2
N$92: DX.A X.ALPS2 X.MX2
N$93: C.ALPS2 C.MX2 DC.A
N$94: DV.A V.ALPS2 V.MX2
N$95: B.ALPS2 B.MX2 DB.A
N$96: DN.A N.ALPS2 N.MX2
N$97: DM.A M.ALPS2 M.MX2
N$98: DSEM.A SEM.ALPS2 SEM.MX2
N$99: DDOP_DUPE.A DOP_DUPE.ALPS2 DOP_DUPE.MX2
N$100: DUND.A UND.ALPS2 UND.MX2
N$101: DSHIFT_DUPE.A SHIFT_DUPE.ALPS2 SHIFT_DUPE.MX2
N$102: COPY.ALPS2 COPY.MX2 DCOPY.A
N$103: DUP.A UP.ALPS2 UP.MX2
N$104: DPASTE.A PASTE.ALPS2 PASTE.MX2
N$105: CTRL.ALPS2 CTRL.MX2 DCTRL.A
N$106: DWIN.A WIN.ALPS2 WIN.MX2
N$107: ALT.ALPS2 ALT.MX2 DALT.A
N$108: DSPACE.A SPACE.ALPS2 SPACE.MX2
N$109: ALTGR.ALPS2 ALTGR.MX2 DALTGR.A
N$110: DWIN_DUPE.A WIN_DUPE.ALPS2 WIN_DUPE.MX2
N$111: DMENU.A MENU.ALPS2 MENU.MX2
N$112: CTRL_DUPE.ALPS2 CTRL_DUPE.MX2 DCTRL_DUPE.A
N$113: DLEFT.A LEFT.ALPS2 LEFT.MX2
N$114: DDOWN.A DOWN.ALPS2 DOWN.MX2
N$115: DRIGHT.A RIGHT.ALPS2 RIGHT.MX2
PB5/OC1A/LED1: IC1.15 R15.2
PB6/OC1B/LED2: IC1.16 R16.2
PD2/RXD1: IC1.27 SER.2
PD3/TXD1: IC1.28 SER.3
PD4/IICRST1: IC1.29 R13.1 U1.47
PD5/IICRST2: IC1.30 R14.1 U2.47
PD6/SDB1: IC1.31 R10.1 U1.46
PD7/SDB2: IC1.32 R11.1 U2.46
PE4_INT4/INTB1: IC1.18 R12.1 U1.45
PE5_INT5/INTB2: IC1.19 R9.1 U2.45
R1 [keyboard]: DANY.C DESC.C DF1.C DF2.C DF3.C DF4.C DF5.C DF6.C DF7.C DF8.C DF9.C DF10.C DF11.C DF12.C DPAUSE.C DPRTSC.C DSCROLLLOCK.C IC1.61
R2 [keyboard]: D0.C D1.C D4.C D5.C D7.C D9.C D=.C DBACKSPACE.C DDEG.C DHOME.C DINSERT.C DKP_SLASH.C DPGUP.C DQUOTE.C DSLASH.C DTOP.C D§.C IC1.60
R3 [keyboard]: D8.C DDELETE.C DE.C DEND.C DENTER.C DI.C DO.C DP.C DPGDN.C DQ.C DR.C DT.C DTAB.C DU.C DW.C DY.C DÜ.C IC1.59
R4 [keyboard]: DA.C DCAPSLOCK.C DD.C DDOP.C DF.C DG.C DH.C DJ.C DK.C DL.C DS.C DÄ.C DÖ.C IC1.58
R5 [keyboard]: DB.C DC.C DCOPY.C DDOP_DUPE.C DM.C DN.C DPASTE.C DPERIOD.C DSEM.C DSHIFT.C DSHIFT_DUPE.C DUND.C DUP.C DV.C DX.C DZ.C IC1.57
R6 [keyboard]: DALT.C DALTGR.C DCTRL.C DCTRL_DUPE.C DDOWN.C DLEFT.C DMENU.C DRIGHT.C DSPACE.C DWIN.C DWIN_DUPE.C IC1.56
RESET: BTN.2 IC1.20 ISP.4 R6.2 S1.3 S1.4
SCL [i2c]: I2C.2 IC1.25 R1.2 U1.42 U2.42
SCLK: IC1.11 ISP.3
SDA [i2c]: I2C.1 IC1.26 R2.1 U1.41 U2.41
USB_N: IC1.4 R3.2
USB_P: IC1.5 R4.2
USBN: JP_USB.3 R4.1
USBP: JP_USB.2 R3.1
VCC [power]: +5V.1 C4.2 C5.+ C6.2 C7.2 C8.2 C9.1 C10.1 C11.1 C12.1 C13.1 C14.1 C17.1 C18.1 C19.1 C21.1 C22.1 C23.1 C24.1 C25.1 C26.+ C27.+ IC1.3 IC1.8 IC1.21 IC1.52 IC1.64 JP_USB.1 LED1.A LED2.A R1.1 R2.2 R5.2 R6.1 R7.2 R9.2 R12.2 R17.2 U1.20 U1.29 U1.37 U1.38 U1.39 U2.20 U2.29 U2.37 U2.38 U2.39 U2.44

## Tracks (layer width: path | path; a pad name or v marks a point on that pad's centre or on a via)
1CS1  (via drill 0.3)
  Top 0.406: TAB.LED+ 14.13,70.96 8.89,76.2 8.89,82.07 10.79,83.98 10.79,88.58 9.53,89.85 DEG.LED+ 9.53,90.01 v11.75,92.23 11.75,92.39 8.89,95.25 8.89,110.33 10.79,112.24 10.79,117.16 9.53,118.43 ESC.LED+
  Bottom 0.254: U1.16 199.84,99.39 199.34,98.89
  Bottom 0.406: v11.75,92.23 19.21,99.69 194.94,99.69 195.9,98.74 199.07,98.74 199.23,98.9 199.34,98.89
1CS2  (via drill 0.3)
  Top 0.406: v199.07,99.69 198.28,98.9 198.28,92.71 197.01,91.44 193.04,91.44 v193.04,91.28 | v36.2,91.28 36.2,72.71 37.94,70.96 Q.LED+ | ANY.LED+ 28.57,118.43 29.84,117.16 29.84,112.24 27.94,110.33 27.94,90.49 28.42,90.01 1.LED+
  Bottom 0.254: U1.17 199.34,99.89 199.11,99.65 198.84,99.39
  Bottom 0.406: v193.04,91.28 192.88,91.44 120.17,91.44 120.02,91.28 119.38,91.28 119.22,91.44 101.12,91.44 100.97,91.28 100.33,91.28 100.17,91.44 82.07,91.44 81.92,91.28 81.28,91.28 81.12,91.44 63.02,91.44 62.87,91.28 62.23,91.28 62.07,91.44 43.97,91.44 43.81,91.28 43.18,91.28 43.02,91.44 36.2,91.44 | 36.2,91.44 30,91.44 28.57,90.01 1.LED+ | v199.07,99.69 199.11,99.65 | v36.2,91.28 36.2,91.44
1CS3  (via drill 0.3)
  Top 0.406: 53.74,96.6 47.62,90.49 47.62,90.01 QUOTE.LED+ | 53.74,96.6 56.59,99.46 | 56.59,99.46 v57.63,100.49 | W.LED+ 56.99,70.96 53.82,74.14 53.82,96.52 53.74,96.6 | F1.LED+ 57.15,118.43 58.42,117.16 58.42,112.24 56.52,110.33 56.52,99.54 56.59,99.46
  Bottom 0.254: U1.18 198.84,100.39 198.19,100.36
  Bottom 0.406: v57.63,100.49 197.64,100.49 198.28,100.33 198.19,100.36
1CS4  (via drill 0.3)
  Top 0.406: E.LED+ 76.04,70.96 71.75,75.25 71.75,85.41 68.74,88.42 66.67,88.42 66.67,89.85 §.LED+ 66.52,90.17 66.52,108.27 72.23,113.98 72.23,114.46 76.04,118.27 F2.LED+ 76.2,118.43 76.2,117.32 v77.79,115.73
  Bottom 0.254: U1.19 198.84,100.89 198.34,101.39
  Bottom 0.406: v77.79,115.73 79.53,115.73 83.19,112.08 90.65,112.08 101.28,101.44 198.28,101.44 198.34,101.39
1CS5  (via drill 0.3)
  Top 0.406: R.LED+ 95.09,70.96 90.81,75.25 90.81,85.41 87.79,88.42 85.72,88.42 85.72,89.85 4.LED+ 85.57,90.17 94.61,99.22 94.61,110.65 97.63,113.67 97.63,115.89 97.71,115.97 | 97.71,115.97 95.25,118.43 F3.LED+ | 97.71,115.97 v98.58,115.09
  Bottom 0.254: U1.21 199.84,101.89 199.34,102.39
  Bottom 0.406: v98.58,115.09 99.22,115.09 102.23,112.08 109.7,112.08 118.75,103.03 198.6,103.03 199.23,102.39 199.34,102.39
1CS6  (via drill 0.3)
  Top 0.406: 107.39,87.87 106.84,88.42 104.78,88.42 104.78,89.85 5.LED+ | 107.39,87.87 109.86,85.41 109.86,75.25 114.14,70.96 T.LED+ | v119.38,113.98 116.36,117 115.57,117 | 115.57,117 114.3,117 114.3,118.43 F4.LED+ | 107.39,87.87 113.67,94.14 113.67,110.65 115.57,112.55 115.57,117
  Bottom 0.254: U1.22 200.34,102.39 199.86,102.87 199.84,102.89
  Bottom 0.406: v119.38,113.98 129.7,103.66 199.07,103.66 199.87,102.87 199.86,102.87
1CS7  (via drill 0.3)
  Top 0.406: 131.44,86.36 127.32,86.36 123.83,89.85 7.LED+ | 131.44,86.36 131.44,72.71 133.19,70.96 Y.LED+ | v145.1,112.08 140.18,117 138.11,117 138.11,118.43 F5.LED+ 137.95,118.27 134.14,114.46 134.14,113.98 131.44,111.28 131.44,86.36
  Bottom 0.254: U1.23 200.84,102.89 200.34,103.39
  Bottom 0.406: v145.1,112.08 152.56,112.08 160.34,104.3 199.55,104.3 200.34,103.5 200.34,103.39
1CS8  (via drill 0.3)
  Top 0.406: 150.5,86.36 146.37,86.36 142.88,89.85 KP_SLASH.LED+ | 150.5,86.36 150.5,72.71 152.24,70.96 U.LED+ | F6.LED+ 157.16,118.43 157.16,117 159.23,117 v164.15,112.08 164.15,111.92 155.26,103.03 155.26,86.36 150.5,86.36
  Bottom 0.254: U1.24 201.34,103.39 200.84,103.89
  Bottom 0.406: v164.15,112.08 171.61,112.08 175.9,107.79 177.8,107.79 180.66,104.93 199.87,104.93 200.82,103.98 200.84,103.89
1CS9  (via drill 0.3)
  Top 0.406: 169.54,86.36 165.42,86.36 161.93,89.85 9.LED+ | 169.54,86.36 169.54,72.71 171.29,70.96 I.LED+ | v183.2,112.08 178.28,117 176.21,117 176.21,118.43 F7.LED+ 176.05,118.27 172.24,114.46 172.24,113.98 169.54,111.28 169.54,86.36
  Bottom 0.254: U1.25 203.34,105.14 202.9,105.58 202.84,105.64
  Bottom 0.406: v183.2,112.08 190.66,112.08 197.17,105.57 202.88,105.57 202.9,105.58
1CS10  (via drill 0.3)
  Top 0.406: v200.98,107.79 200.34,108.43 200.34,109.22 | 200.34,109.22 200.34,113.98 197.33,117 195.26,117 195.26,118.43 F8.LED+ | 190.82,94.77 190.82,99.85 200.18,109.22 200.34,109.22 | 190.82,94.77 190.82,81.6 190.34,81.12 190.34,70.96 O.LED+ | 0.LED+ 180.97,90.01 182.72,91.76 182.72,96.52 185.74,99.54 186.85,99.54 186.85,98.58 190.66,94.77 190.82,94.77
  Bottom 0.254: U1.26 203.84,105.64 203.34,106.14
  Bottom 0.406: v200.98,107.79 202.56,106.2 203.36,106.2 203.34,106.14
1CS11  (via drill 0.3)
  Top 0.406: v202.88,107 200.5,104.62 200.5,90.49 200.03,90.01 =.LED+ 200.03,89.85 200.03,88.9 v201.77,87.15 | v207.49,83.03 207.49,72.87 209.39,70.96 P.LED+ | v211.93,87.15 211.93,90.17 213.04,91.28 213.04,105.73 212.57,106.2 212.57,110.81 218.6,110.81 220.34,112.55 220.34,117.16 219.07,118.43 F9.LED+
  Bottom 0.254: U1.27 204.34,106.14 203.84,106.64
  Bottom 0.406: v202.88,107 203.04,106.84 203.68,106.84 203.84,106.68 203.84,106.64 | v201.77,87.15 203.36,87.15 v207.49,83.03 207.8,83.03 v211.93,87.15
1CS12  (via drill 0.3)
  Top 0.406: v203.68,107.63 203.68,98.42 v204.31,97.79 | 218.52,96.12 218.92,95.73 218.92,90.01 SLASH.LED+ | 218.52,96.12 v218.28,96.36 | 220.03,96.2 224.79,91.44 224.79,74.61 228.44,70.96 Ü.LED+ | 220.03,96.2 218.6,96.2 218.52,96.12 | 220.03,96.2 220.03,97.16 233.04,110.17 233.04,113.51 237.97,118.43 F10.LED+
  Bottom 0.254: U1.28 204.84,106.64 204.34,107.14
  Bottom 0.406: v203.68,107.63 203.84,107.63 204.31,107.16 204.34,107.14 | v204.31,97.79 204.47,97.63 209.07,97.63 210.34,96.36 v218.28,96.36
1CS13  (via drill 0.3)
  Top 0.406: 8.LED+ 247.49,70.96 247.49,75.41 245.27,77.63 245.27,89.38 243.21,89.38 242.41,88.58 242.41,88.42 239.55,88.42 238.12,89.85 TOP.LED+ 237.97,90.17 240.03,92.23 240.03,98.74 252.25,110.97 257.33,110.97 257.33,111.44 258.44,112.55 258.44,117.16 257.18,118.43 F11.LED+ | v205.1,108.43 205.1,116.68 v208.12,119.7
  Bottom 0.254: U1.30 205.84,107.64 205.4,108.08 205.34,108.14
  Bottom 0.406: v205.1,108.43 205.42,108.11 205.4,108.08 | v208.12,119.7 208.44,120.02 255.59,120.02 257.02,118.59 F11.LED+
1CS14  (via drill 0.3)
  Top 0.406: v209.07,108.58 209.71,107.95 209.71,106.2 209.87,106.05 209.87,95.09 v209.71,94.93 | v219.71,95.41 224.16,90.96 224.16,83.19 v224,83.03 | 265.19,88.5 266.54,89.85 BACKSPACE.LED+ | 265.19,88.5 v263.05,86.36 | 269.32,87.87 268.76,88.42 265.27,88.42 265.19,88.5 | 269.32,87.87 271.78,85.41 271.78,84.3 271.14,83.66 271.14,61.28 269.88,60.01 269.88,50.96 266.86,50.96 265.91,51.91 265.91,56.04 267.33,57.47 ENTER.LED+ | 269.32,87.87 270.67,89.22 270.67,90.17 274.16,93.66 274.16,108.9 277.5,112.24 277.5,117.16 276.23,118.43 F12.LED+
  Bottom 0.254: U1.31 206.34,107.64 206.84,108.12 206.84,108.14
  Bottom 0.406: v209.07,108.58 207.33,108.58 206.85,108.11 206.84,108.12 | v209.71,94.93 209.87,94.77 217.96,94.77 218.6,95.41 v219.71,95.41 | v224,83.03 234.95,83.03 235.59,82.39 237.81,82.39 240.51,85.09 240.51,86.36 v263.05,86.36
1CS15  (via drill 0.3)
  Top 0.406: DELETE.LED+ 299.88,70.96 299.88,79.69 299.4,80.17 299.4,82.07 301.31,83.98 301.31,88.58 300.04,89.85 INSERT.LED+ 299.88,90.17 294,96.04 294,105.57 293.85,105.73 v293.85,109.06 295.75,110.97 300.2,110.97 300.2,111.44 301.31,112.55 301.31,117.16 300.04,118.43 PRTSC.LED+ | v207.01,107.31 206.06,108.27 206.06,110.17 v205.9,110.33 | v220.66,106.52 v218.28,108.9
  Bottom 0.254: U1.32 206.84,107.14 v207.02,107.31
  Bottom 0.406: v205.9,110.33 207.17,111.6 215.58,111.6 v218.28,108.9 | v220.66,106.52 232.25,106.52 232.73,106.05 281.78,106.05 284.8,109.06 v293.85,109.06 | v207.01,107.31 v207.02,107.31
1CS16  (via drill 0.3)
  Top 0.406: END.LED+ 318.93,70.96 318.45,71.44 318.45,82.07 320.36,83.98 320.36,88.58 319.09,89.85 HOME.LED+ 318.93,90.17 318.45,90.65 318.45,110.65 320.36,112.55 320.36,117.16 319.09,118.43 SCROLLLOCK.LED+ 318.93,118.59 318.93,120.65 294.8,120.65 v288.29,114.14 | v213.36,107.79 216.69,104.46 222.73,104.46 222.73,106.84 227.49,111.6 229.39,111.6 v229.39,111.28
  Bottom 0.254: U1.33 207.34,106.64 207.84,107.14
  Bottom 0.406: v213.36,107.79 208.6,107.79 207.96,107.16 207.84,107.14 | v229.39,111.28 229.87,110.81 234.79,110.81 238.92,106.68 280.83,106.68 v288.29,114.14
1SW1_G  (via drill 0.3)
  Top 0.406: v201.45,120.02 201.93,120.49 212.41,120.49 212.41,117.95 213.36,117 216.38,117 216.38,118.43 F9.G- 216.38,118.75 217.65,120.02 231.46,120.02 231.46,115.41 231.54,115.33 | SCROLLLOCK.G- 316.39,118.59 316.39,120.02 298.77,120.02 298.45,119.7 298.45,119.54 297.5,118.59 PRTSC.G- 297.18,118.59 v293.53,114.94 | v215.26,95.57 230.35,110.65 230.35,114.14 231.54,115.33 | 231.54,115.33 233.2,117 235.43,117 235.43,118.43 F10.G- 235.43,118.75 235.43,120.02 241.14,120.02 242.09,119.06 242.09,115.41 251.46,115.41 253.13,117.08 | 253.13,117.08 254.48,118.43 F11.G- | v270.51,115.41 273.53,118.43 F12.G- | v257.65,115.41 256.06,117 253.21,117 253.13,117.08 | F2.G- 73.66,118.59 73.66,120.02 79.22,120.02 80.17,119.06 80.17,115.41 89.53,115.41 92.55,118.43 F3.G- 92.71,118.43 92.71,118.27 v95.25,115.73 | v108.58,115.41 111.6,118.43 F4.G- | v131.92,114.94 135.41,118.43 F5.G- | v150.97,114.94 154.46,118.43 F6.G- | v170.02,114.94 173.51,118.43 F7.G- | v190.98,115.73 190.98,116.84 192.56,118.43 F8.G-
  Bottom 0.254: U1.2 208.34,95.86 208.7,95.51
  Bottom 0.406: v201.45,120.02 192.72,120.02 192.72,118.59 F8.G- | 208.7,95.51 209.39,95.73 215.11,95.73 v215.26,95.57 | v257.65,115.41 v270.51,115.41 270.51,115.25 271.14,115.25 271.14,113.51 273.69,110.97 275.91,110.97 277.02,112.08 277.34,112.08 277.34,112.87 279.4,114.94 v293.53,114.94 | ESC.G- 6.99,118.59 6.99,120.02 24.45,120.02 25.88,118.59 ANY.G- 25.88,118.75 27.15,120.02 47.62,120.02 47.78,119.86 51.12,119.86 51.28,120.02 54.61,120.02 | 54.61,120.02 54.61,118.59 F1.G- | 54.61,120.02 72.07,120.02 73.5,118.59 F2.G- | v95.25,115.73 95.41,115.89 99.38,115.89 99.85,115.41 v108.58,115.41 108.58,115.25 109.22,115.25 109.22,113.51 111.76,110.97 113.98,110.97 115.09,112.08 115.41,112.08 115.41,112.87 117.47,114.94 v131.92,114.94 131.92,114.78 133.03,114.78 133.03,113.51 135.57,110.97 137.79,110.97 138.91,112.08 139.22,112.08 139.22,112.87 141.29,114.94 v150.97,114.94 150.97,114.78 152.08,114.78 152.08,113.51 154.62,110.97 156.84,110.97 157.96,112.08 158.27,112.08 158.27,112.87 160.34,114.94 v170.02,114.94 170.02,114.78 171.13,114.78 171.13,113.51 173.67,110.97 175.9,110.97 177.01,112.08 177.32,112.08 177.32,112.87 179.39,114.94 190.18,114.94 v190.98,115.73
1SW2_R  (via drill 0.3)
  Top 0.406: ESC.R- 12.06,118.59 21.91,118.59 21.91,119.22 22.7,120.02 30.96,120.02 30.96,118.59 ANY.R- 31.11,118.43 v37.78,111.76 | v67.15,110.97 59.69,118.43 F1.R- | v75.88,110.97 78.58,113.67 78.58,118.43 F2.R- | 140.49,120.02 132.24,120.02 131.44,119.22 131.44,118.59 116.84,118.59 F4.R- 116.68,118.75 116.68,120.02 v108.43,120.02 | 140.49,120.02 140.49,118.59 F5.R- | 158.35,119.94 158.27,120.02 140.49,120.02 | 158.35,119.94 158.59,119.7 158.59,119.54 159.54,118.59 F6.R- | 158.35,119.94 158.43,120.02 177.32,120.02 177.64,119.7 177.64,119.54 178.59,118.59 F7.R- 178.75,118.59 188.59,118.59 188.59,119.22 189.39,120.02 197.64,120.02 197.64,118.59 F8.R- | v208.6,94.3 208.91,94.61 208.91,97.79 209.23,98.11 209.23,105.73 208.44,106.52 208.44,108.11 207.33,109.22 207.33,113.67 | v207.33,117.79 207.33,113.67 | v221.14,115.73 221.14,118.11 221.46,118.43 F9.R- | v219.07,115.73 218.76,116.05 209.87,116.05 207.49,113.67 207.33,113.67 | v239.4,112.55 239.4,117.32 240.51,118.43 F10.R- | v259.24,113.35 259.24,118.11 259.56,118.43 F11.R-
  Bottom 0.254: U1.3 207.84,94.89 208.34,94.39
  Bottom 0.406: v75.88,110.97 v67.15,110.97 66.99,110.97 66.36,111.6 65.56,111.6 61.75,107.79 57.47,107.79 53.66,111.6 37.94,111.6 v37.78,111.76 | 97.63,120.02 97.63,118.59 F3.R- | 97.63,120.02 80.17,120.02 78.74,118.59 F2.R- | F11.R- 259.71,118.59 261.14,120.02 277.34,120.02 278.76,118.59 F12.R- 278.92,118.59 292.74,118.59 294.16,120.02 303.85,120.02 303.93,119.94 | 303.93,119.94 304.01,120.02 320.2,120.02 321.63,118.59 SCROLLLOCK.R- | 303.93,119.94 302.58,118.59 PRTSC.R- | v208.6,94.3 208.44,94.46 208.34,94.39 | v207.33,117.79 206.22,118.9 198.12,118.9 197.8,118.59 F8.R- | v219.07,115.73 v221.14,115.73 222.41,115.73 226.06,112.08 234.47,112.08 235.59,110.97 237.81,110.97 v239.4,112.55 239.4,113.03 241.3,114.94 243.84,114.94 247.81,110.97 256.86,110.97 v259.24,113.35 | v108.43,120.02 97.63,120.02
1SW3_B  (via drill 0.3)
  Top 0.406: v207.49,94.3 208.28,95.09 208.28,98.11 208.6,98.42 208.6,105.41 207.8,106.2 207.8,107.79 206.69,108.9 206.69,115.57 v206.53,115.73 | 251.94,120.02 251.94,118.59 F11.B- | 251.94,120.02 251.94,120.65 235.11,120.65 233.04,118.59 F10.B- 232.89,118.75 232.89,120.65 216.06,120.65 214,118.59 F9.B- | 251.94,120.02 260.19,120.02 261.14,119.06 261.14,118.59 270.99,118.59 F12.B- 270.99,118.75 270.99,120.02 279.24,120.02 280.19,119.06 280.19,118.27 v280.67,117.79 | 70.96,120.02 53.5,120.02 52.07,118.59 F1.B- 51.91,118.75 51.91,121.44 7.3,121.44 4.45,118.59 ESC.B- | 70.96,120.02 70.96,118.59 F2.B- | 70.96,120.02 70.96,120.65 83.19,120.65 85.25,118.59 90.01,118.59 F3.B- 90.01,118.75 90.01,120.02 98.27,120.02 99.22,119.06 99.22,118.59 109.06,118.59 F4.B- | v195.26,115.73 194.94,116.05 191.77,116.05 191.77,115.41 191.29,114.94 190.18,114.94 190.18,118.43 F8.B-
  Bottom 0.254: U1.4 207.34,94.39 207.46,94.27
  Bottom 0.406: 207.41,116.6 209.23,118.43 213.84,118.43 F9.B- | 207.41,116.6 v206.53,115.73 | v207.49,94.3 207.46,94.27 | SCROLLLOCK.B- 313.85,118.43 309.25,118.43 307.82,117 296.86,117 296.7,117.16 296.23,117.16 294.96,118.43 PRTSC.B- 294.8,118.43 294.16,117.79 v280.67,117.79 | 150.5,120.02 134.46,120.02 133.03,118.59 F5.B- 132.72,118.59 131.29,120.02 110.65,120.02 109.22,118.59 F4.B- | 150.5,120.02 151.92,118.59 F6.B- | 169.62,119.94 169.54,120.02 150.5,120.02 | 169.62,119.94 170.97,118.59 F7.B- | F8.B- 190.02,118.59 188.59,120.02 169.7,120.02 169.62,119.94 | ESC.B- 4.45,118.43 5.87,117 17.3,117 18.73,118.43 23.34,118.43 ANY.B- | 207.41,116.6 205.74,118.27 200.82,118.27 200.03,117.47 200.03,115.73 v195.26,115.73
1SW4_G  (via drill 0.3)
  Top 0.406: v214.63,91.76 216.38,90.01 SLASH.G- | v233.36,92.08 235.43,90.01 TOP.G- | v258.44,95.57 264,90.01 BACKSPACE.G- | v290.04,91.44 285.75,91.44 v285.75,89.85 | v271.46,89.85 v275.75,89.85 | v42.7,92.23 44.93,90.01 QUOTE.G- | v62.55,92.08 62.55,91.44 63.98,90.01 §.G- | v81.6,92.08 81.6,91.44 83.03,90.01 4.G- | v100.65,92.08 100.65,91.44 102.08,90.01 5.G- | v119.7,92.08 119.7,91.44 121.13,90.01 7.G- | v138.91,92.23 138.91,91.28 140.18,90.01 KP_SLASH.G- | v157,92.23 159.23,90.01 9.G- | v176.05,92.23 178.28,90.01 0.G- | v206.06,92.39 204.95,91.28 v204.47,91.28
  Bottom 0.254: U1.6 206.34,93.39 206.78,92.95 206.84,92.89
  Bottom 0.406: 297.5,91.44 297.5,90.01 INSERT.G- | 297.5,91.44 303.05,91.44 303.21,91.28 313.06,91.28 313.21,91.44 314.96,91.44 316.39,90.01 HOME.G- | 206.84,92.89 206.85,92.87 207.96,91.76 v214.63,91.76 214.95,91.76 215.26,92.08 v233.36,92.08 241.3,92.08 241.62,91.76 244.16,91.76 248.13,95.73 258.29,95.73 v258.44,95.57 | v290.04,91.44 297.5,91.44 | v275.75,89.85 v285.75,89.85 | v271.46,89.85 269.88,91.44 265.43,91.44 264,90.01 BACKSPACE.G- | DEG.G- 6.99,90.01 6.99,91.44 24.45,91.44 25.88,90.01 1.G- 25.88,90.17 27.78,92.08 42.55,92.08 v42.7,92.23 42.7,92.08 v62.55,92.08 v81.6,92.08 v100.65,92.08 v119.7,92.08 138.75,92.08 v138.91,92.23 v157,92.23 v176.05,92.23 176.05,92.08 195.26,92.08 195.98,91.36 | 195.98,91.36 197.33,90.01 =.G- | 206.78,92.95 206.22,92.39 v206.06,92.39 | v204.47,91.28 204.31,91.44 196.06,91.44 195.98,91.36
1SW5_R  (via drill 0.3)
  Top 0.406: v303.53,92.08 303.53,90.96 302.58,90.01 INSERT.R- 302.42,90.17 294.8,97.79 v294.8,103.82 | v241.46,96.52 240.66,95.73 240.66,90.01 TOP.R- | BACKSPACE.R- 269.08,90.01 268.13,90.96 v268.13,92.87 268.13,103.5 v269.88,105.25 | v136.21,90.65 138.59,93.03 145.26,93.03 | 145.26,93.03 145.26,90.01 KP_SLASH.R- | v163.35,93.03 163.35,90.96 164.31,90.01 9.R- | v145.41,93.03 145.26,93.03 | v183.51,92.87 183.51,90.01 0.R- | 5.R- 107.16,90.01 107.16,92.87 100.33,92.87 97.16,89.69 97.16,85.57 92.55,85.57 88.27,89.85 4.R- 88.11,90.17 89.38,91.44 v89.38,92.87 | v17.78,89.85 21.91,89.85 21.91,89.38 22.86,88.42 30.96,88.42 30.96,89.85 1.R- | v36.99,90.01 38.26,88.74 38.26,88.42 48.58,88.42 50.01,89.85 QUOTE.R- 50.16,90.01 v53.02,92.87 | v68.1,92.87 68.1,90.96 69.06,90.01 §.R- | v116.36,90.65 116.36,92.87 123.51,92.87 125.25,91.12 125.25,90.96 126.21,90.01 7.R- | v211.14,90.65 211.14,86.36 212.25,86.36 212.72,86.84 212.72,87.47 219.07,87.47 221.46,89.85 SLASH.R-
  Bottom 0.254: U1.7 205.84,93.39 205.34,92.89
  Bottom 0.406: v303.53,92.08 319.56,92.08 321.63,90.01 HOME.R- | SLASH.R- 221.62,89.85 222.41,89.06 231.78,89.06 232.41,88.42 239.08,88.42 240.51,89.85 TOP.R- | v268.13,92.87 264.48,96.52 v241.46,96.52 | v294.8,103.82 293.05,105.57 282.26,105.57 281.94,105.25 v269.88,105.25 | 205.26,90.65 205.26,90.01 202.56,90.01 =.R- | 205.26,90.65 205.26,92.23 | 205.26,92.23 205.26,92.87 205.34,92.89 | v136.21,90.65 127,90.65 126.36,90.01 7.R- | v145.41,93.03 v163.35,93.03 183.36,93.03 v183.51,92.87 195.42,92.87 196.06,92.23 205.26,92.23 | v17.78,89.85 12.06,89.85 DEG.R- | v36.99,90.01 31.11,90.01 1.R- | v53.02,92.87 v68.1,92.87 v89.38,92.87 | v116.36,90.65 116.2,90.49 107.79,90.49 107.31,90.01 5.R- | 205.26,90.65 v211.14,90.65
1SW6_B  (via drill 0.3)
  Top 0.305: v204.47,93.03 203.68,92.23 203.68,90.81 203.84,90.65 203.84,88.27 201.93,86.36 200.66,86.36 198.44,88.58 194.94,88.58 194.94,89.85 =.B- | v308.61,95.25 313.85,90.01 HOME.B- | v272.26,90.65 v276.23,90.65
  Bottom 0.254: U1.8 205.34,93.89 204.84,93.39
  Bottom 0.305: DEG.B- 4.45,89.85 5.71,88.58 17.46,88.58 18.73,89.85 23.34,89.85 1.B- 23.5,89.85 24.77,88.58 36.51,88.58 37.78,89.85 42.39,89.85 QUOTE.B- 42.55,89.85 43.81,88.58 55.56,88.58 56.83,89.85 61.44,89.85 §.B- 61.59,89.85 62.87,88.58 74.61,88.58 75.88,89.85 80.49,89.85 4.B- 80.64,89.85 81.92,88.58 93.66,88.58 94.93,89.85 99.54,89.85 5.B- 99.69,89.85 100.97,88.58 112.71,88.58 113.98,89.85 118.59,89.85 7.B- 118.75,89.85 120.02,88.58 131.76,88.58 133.03,89.85 137.64,89.85 KP_SLASH.B- 137.79,89.85 139.06,88.58 150.81,88.58 152.08,89.85 156.69,89.85 9.B- 156.84,89.85 158.12,88.58 169.86,88.58 171.13,89.85 175.74,89.85 0.B- 175.9,89.85 177.16,88.58 188.91,88.58 190.18,89.85 194.79,89.85 =.B- 194.94,89.85 196.22,88.58 207.96,88.58 209.23,89.85 213.84,89.85 SLASH.B- 214,90.01 215.42,91.44 231.46,91.44 232.89,90.01 TOP.B- 233.04,90.01 234.47,91.44 241.14,91.44 242.57,90.01 261.46,90.01 BACKSPACE.B- 261.62,90.01 263.68,92.08 270.83,92.08 v272.26,90.65 | v204.47,93.03 204.79,93.34 204.84,93.39 | v308.61,95.25 290.83,95.25 289.4,93.82 281.46,93.82 278.29,90.65 v276.23,90.65
1SW7_G  (via drill 0.3)
  Top 0.406: v299.08,74.61 298.45,73.98 298.45,71.91 297.5,70.96 DELETE.G- | v204.63,94.14 206.69,94.14 206.69,92.87 206.85,92.71 206.85,83.5 206.69,83.34 206.69,71.12 206.85,70.96 P.G- | v261.78,60.48 257.49,64.77 v257.49,70.01 | v290.83,72.39 286.54,68.1 v286.54,62.71
  Bottom 0.254: U1.9 204.84,94.39 204.61,94.15 204.34,93.89